# Altium PCB cw308_k82.PcbDoc
Units mil, origin at the board's own origin, x right, y up, seen from the top; angles counter-clockwise.
Board outline 2055 x 2540 mil, 2 copper layers (Top Layer, Bottom Layer); 17 components, 40 nets, 216 pads, 69 vias.
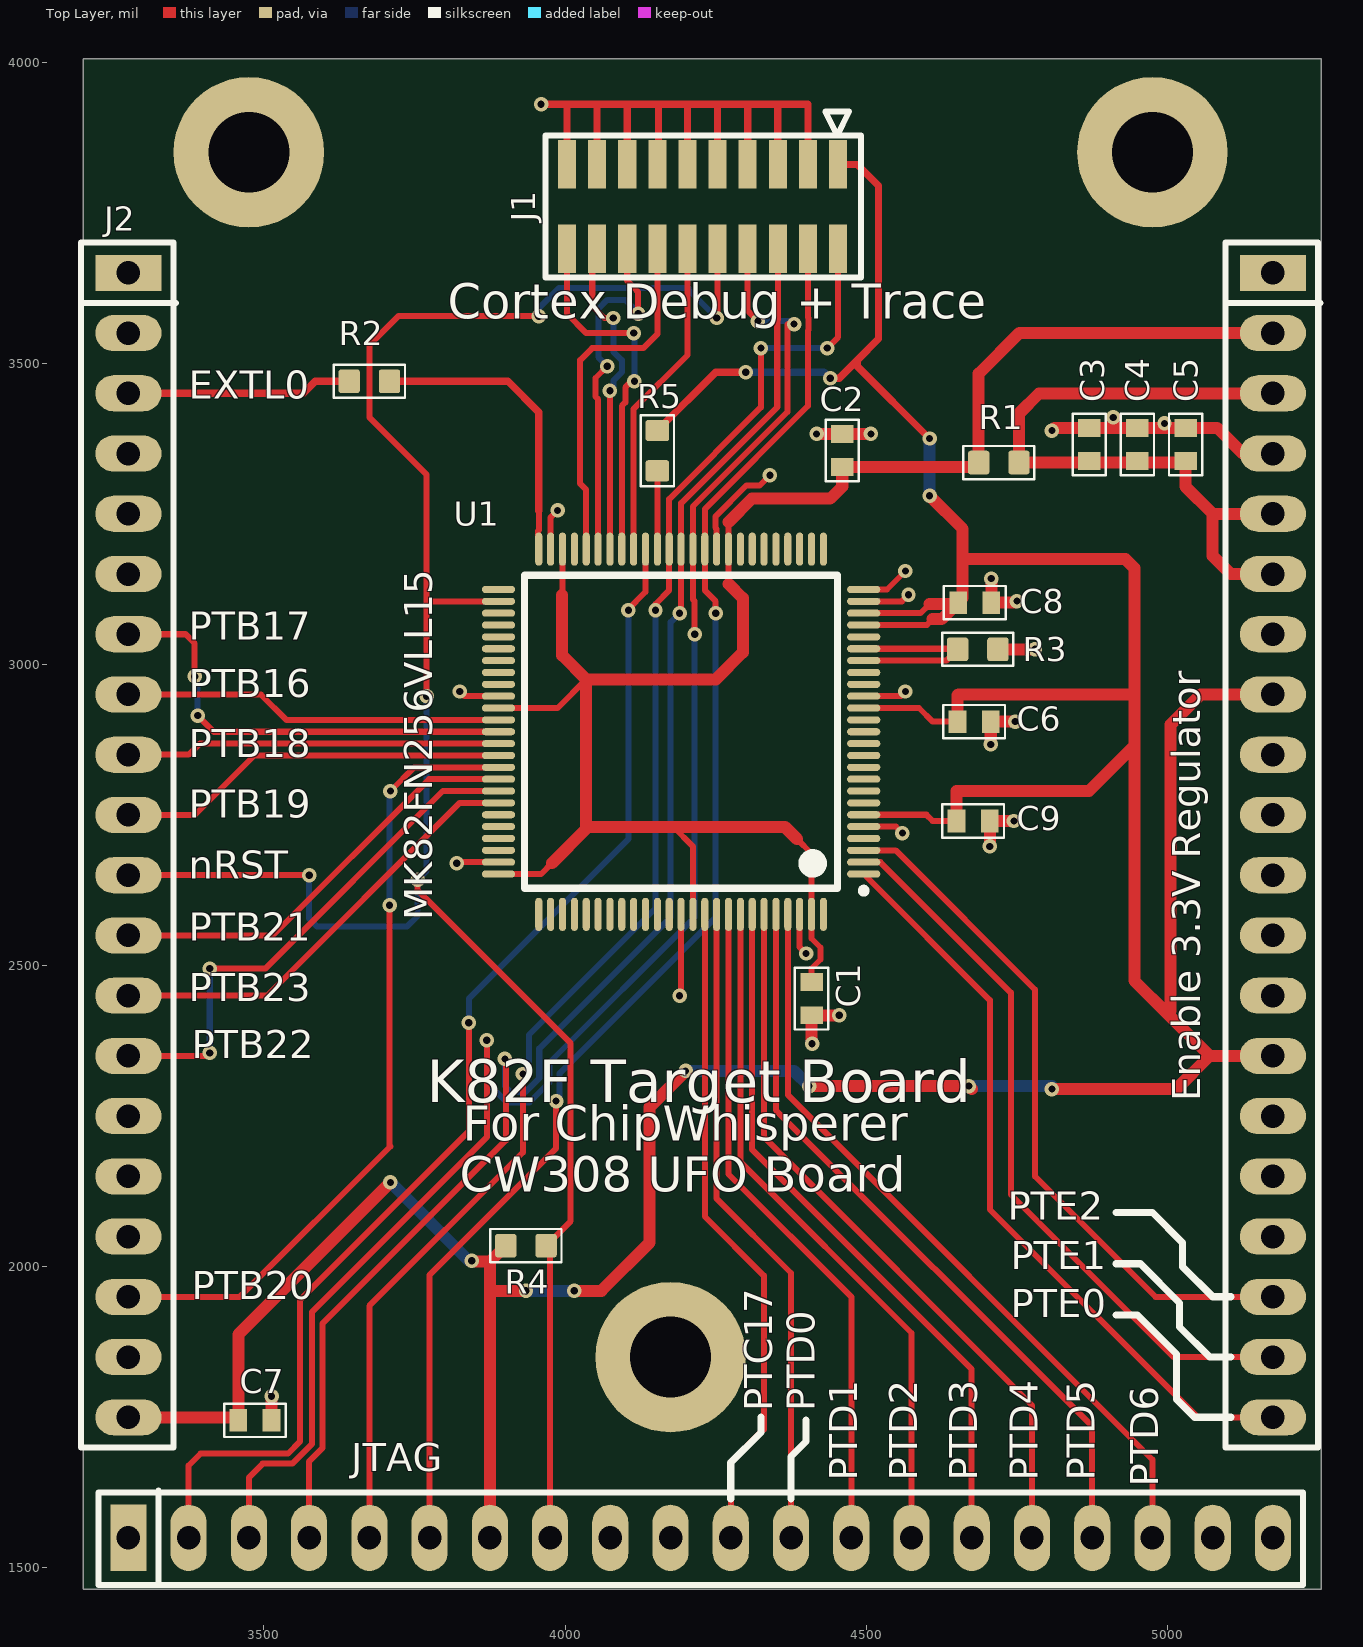
[diagram p0: Top Layer view]
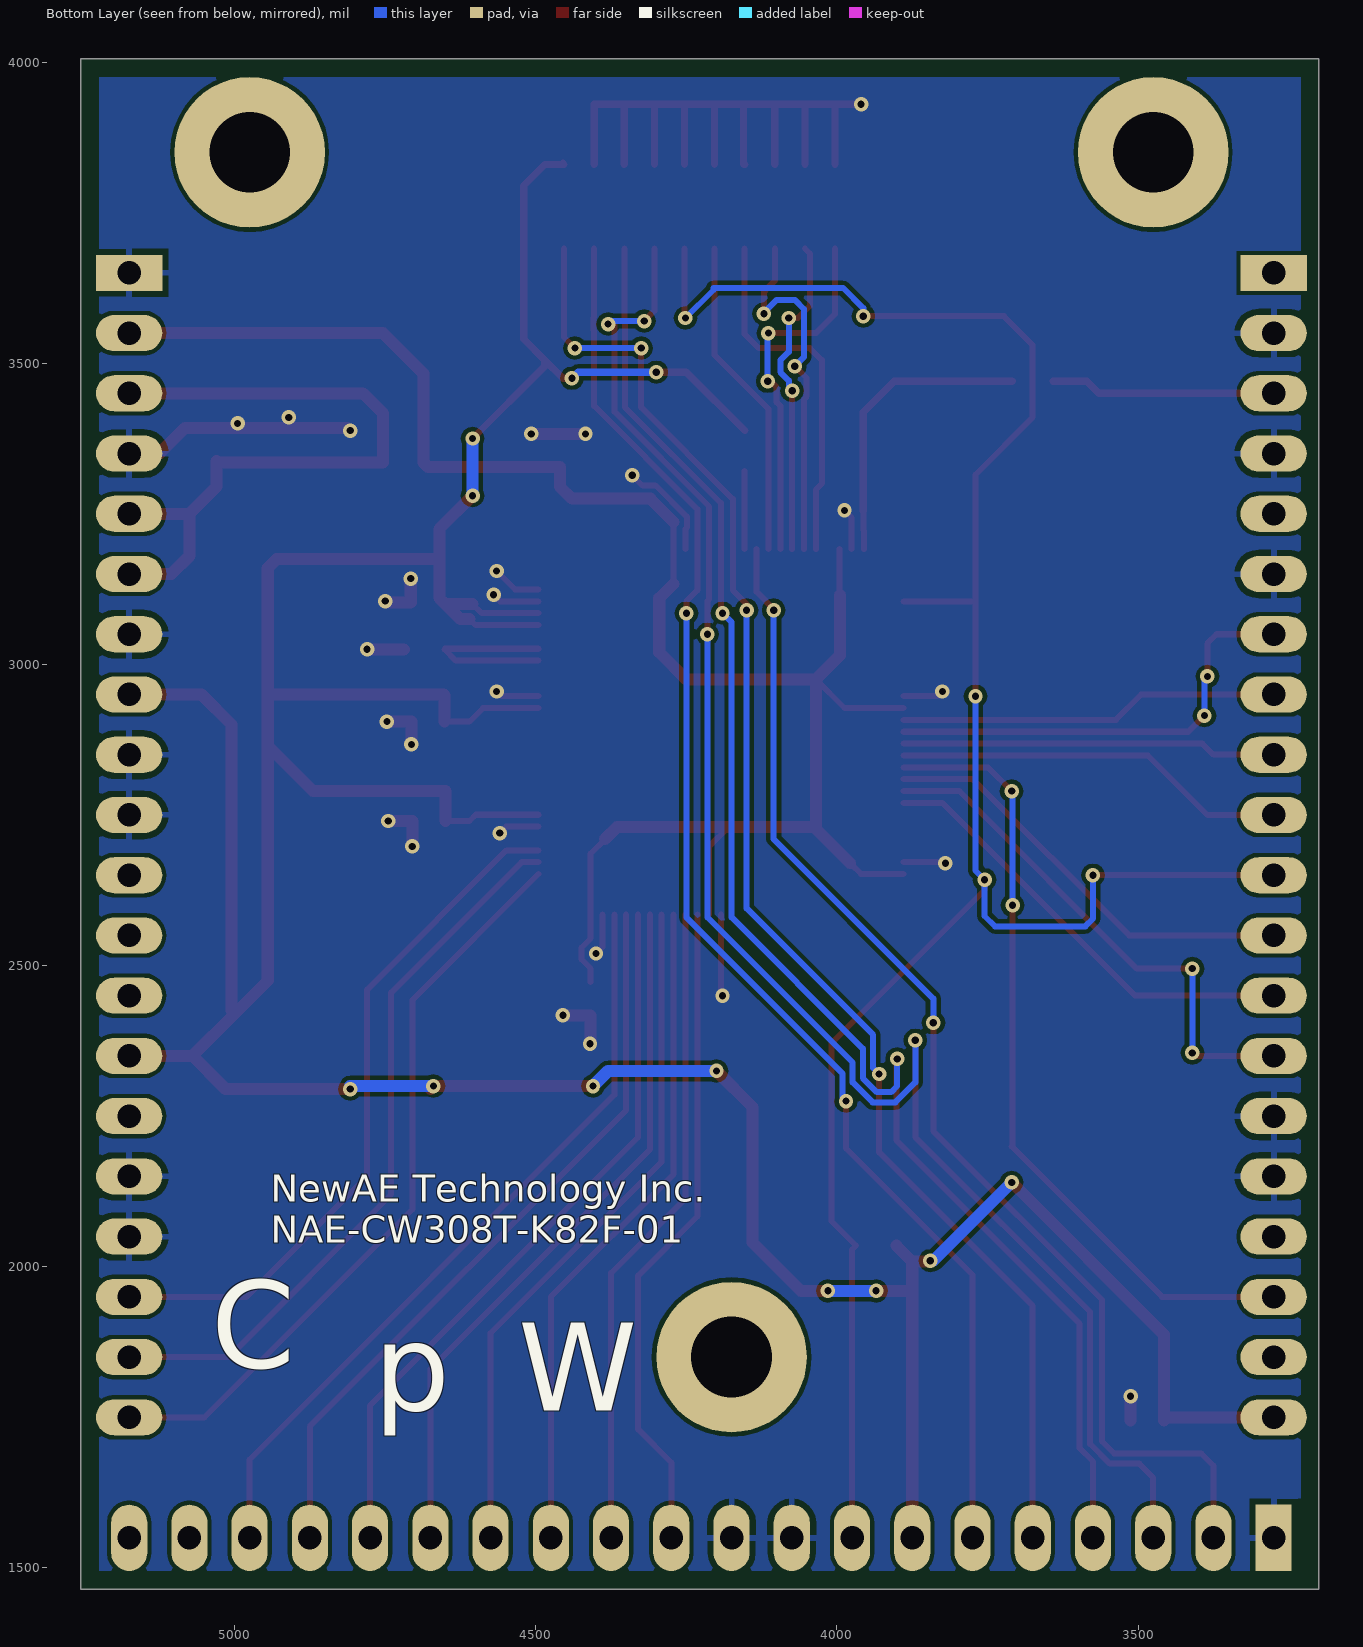
[diagram p1: Bottom Layer view, seen from below]

## Layer stack, top to bottom
Top Solder: solder mask 0.4, Solder Resist, Dk 3.5
Top Layer: signal copper 1.4
Dielectric 1: dielectric 12.6, FR-4, Dk 4.8
Bottom Layer: signal copper 1.4
Bottom Solder: solder mask 0.4, Solder Resist, Dk 3.5

## Board outline
3200,1465 5255,1465 5255,4005 3200,4005

## Design rules (kind name [scope] priority, off if disabled: settings)
BoardOutlineClearance Silk_to_Outline [(OnLayer('Top Overlay'))] p1: gap=0 ignorepadtopadclearanceinfootprint=FALSE
BoardOutlineClearance [All] p2: gap=30 ignorepadtopadclearanceinfootprint=FALSE
Clearance [All] p1: gap=7 ignorepadtopadclearanceinfootprint=FALSE
HoleSize [All] p1: absolutevalues=TRUE maxlimit=200 minlimit=1 maxpercent=80.000 minpercent=20.000
MinimumSolderMaskSliver [All] p1: minsoldermaskwidth=5
PlaneConnect PlaneConnect_viaDirect [IsVia] p1: planeconnectstyle=Direct reliefexpansion=20 reliefentries=4 reliefconductorwidth=10 reliefairgap=10
PlaneConnect [All] p2: planeconnectstyle=Relief reliefexpansion=20 reliefentries=4 reliefconductorwidth=10 reliefairgap=10
PolygonConnect PolygonConnect_viaDirect [All vs isVia] p1: connectstyle=Direct reliefconductorwidth=10 reliefentries=4 polygonreliefangle="90 Angle" airgapwidth=10
PolygonConnect [All] p2: connectstyle=Relief reliefconductorwidth=10 reliefentries=4 polygonreliefangle="90 Angle" airgapwidth=10
RoutingVias [All] p1: holewidth=12 width=24 viastyle="Through Hole" minholewidth=12 minwidth=24 maxholewidth=100 maxwidth=200
SilkToSilkClearance [All] p1: silktosilkclearance=5
SilkToSolderMaskClearance [IsPad] p1: minsilkscreentomaskgap=5 clearancetoexposedcopper=TRUE
SolderMaskExpansion [All] p1: expansion=4
Width [All] p1: maxlimit=100 minlimit=6 preferedwidth=8 minimp=50.000000 maximp=50.000000 favimp=50.000000
25 further rules are at their usual default settings.

## Classes and differential pairs
component class CW308_K82_UFO: J2

## Components (designator, comment, footprint, x,y, rotation, side; value= is the part's Value field where it differs from the comment)
C1 "DNM" CAPC0603_M 4409.02,2445 r270 top value=100n
C2 "DNM" CAPC0603_M 4460,3355 r90 top value=100n
C3 "100n" CAPC0603_M 4870,3365 r90 top
C4 "100n" CAPC0603_M 4950,3365 r90 top
C5 "2u2" CAPC0603_M 5030,3365 r90 top
C6 "100n" CAPC0603_M 4678.98,2905 r0 top
C7 "100n" CAPC0603_M 3485,1745 r0 top
C8 "100n" CAPC0603_M 4680,3102.48 r0 top
C9 "100n" CAPC0603_M 4677.44,2740 r0 top
J1 "1296-T20" 1296-T20 4353.11,3760.12 r180 top
J2 "CW308_TARGETCON" CW308_TBOARD_CONN 3275,3650 r0 top locked
R1 "10R" RESC1608X55N 4720,3335 r0 top
R2 "10R" RESC1608X55N 3675,3470 r0 top
R3 "10k" RESC1608X55N 4685,3025 r0 top
R4 "10k" RESC1608X55N 3935,2035 r180 top
R5 "10k" RESC1608X55N 4153.11,3354.69 r270 top
U1 "MK82FN256VLL15" SQFP50P1600X1600X170-100N 4192.48,2888.15 r180 top

## Footprints (in the part's own frame and the unit in brackets; to place one, negate y for a bottom-side part, rotate by r counter-clockwise, add the part's x,y. Pads: shape width x height; smd on the part's side, far side on the other; paste and mask are expansions set on the pad)
1296-T20 [mm] "1.27mm x 20-pin"
  rect 0.76x2.05 smd: 1(-2.54,-1.775) 2(-2.54,1.775) 3(-1.27,-1.775) 4(-1.27,1.775) 5(0,-1.775) 6(0,1.775) 7(1.27,-1.775) 8(1.27,1.775) 9(2.54,-1.775) 10(2.54,1.775) 11(3.81,-1.775) 12(3.81,1.775) 13(5.08,-1.775) 14(5.08,1.775) 15(6.35,-1.775) 16(6.35,1.775) 17(7.62,-1.775) 18(7.62,1.775) 19(8.89,-1.775) 20(8.89,1.775)
  silkscreen extent -3.5,-4 9.8,3
CAPC0603_M [mm]
  rect 0.75x0.95 smd: 1(-0.7,0) 2(0.7,0)
  silkscreen extent -1.3,-0.7 1.3,0.7, body extent -0.85,-0.45 0.85,0.45, height 0.9
CW308_TBOARD_CONN [mil]
  rect 110x60 hole 39: A1(0,0) C1(1900,0)
  oval 110x60 hole 39: A2(0,-100) A3(0,-200) A4(0,-300) A5(0,-400) A6(0,-500) A7(0,-600) A8(0,-700) A9(0,-800) A10(0,-900) A11(0,-1000) A12(0,-1100) A13(0,-1200) A14(0,-1300) A15(0,-1400) A16(0,-1500) A17(0,-1600) A18(0,-1700) A19(0,-1800) A20(0,-1900) C2(1900,-100) C3(1900,-200) C4(1900,-300) C5(1900,-400) C6(1900,-500) C7(1900,-600) C8(1900,-700) C9(1900,-800) C10(1900,-900) C11(1900,-1000) C12(1900,-1100) C13(1900,-1200) C14(1900,-1300) C15(1900,-1400) C16(1900,-1500) C17(1900,-1600) C18(1900,-1700) C19(1900,-1800) C20(1900,-1900)
  rect 60x110 hole 39: B1(0,-2100)
  oval 60x110 hole 39: B2(100,-2100) B3(200,-2100) B4(300,-2100) B5(400,-2100) B6(500,-2100) B7(600,-2100) B8(700,-2100) B9(800,-2100) B10(900,-2100) B11(1000,-2100) B12(1100,-2100) B13(1200,-2100) B14(1300,-2100) B15(1400,-2100) B16(1500,-2100) B17(1600,-2100) B18(1700,-2100) B19(1800,-2100) B20(1900,-2100)
  round 250 hole 134: MH1(200,200) MH2(900,-1800) MH2(1700,200)
  silkscreen extent -79,-2179 1979,50, body extent -50,-2149 1950,50, height 48
RESC1608X55N [mm] "Chip Resistor, Body 1.6x0.8mm, EIA 0603, IPC Medium Density"
  round 0.254 on Mech15: 0(0,0)
  rrect25% 0.9x1 smd: 1(-0.85,0) 2(0.85,0)
  Top Layer pour cut-out: -0.6,0.5 0.6,0.5 0.6,-0.5 -0.6,-0.5
  silkscreen extent -1.5,-0.7 1.5,0.7, body extent -0.87,-0.47 0.88,0.48, height 0.54
SQFP50P1600X1600X170-100N [mm] "SQFP, 100-Leads, Body 14.00x14.00mm, Pitch 0.50mm, IPC Medium Density"
  oval 1.4x0.3 smd paste-0.051: 1(-7.7,6) 2(-7.7,5.5) 3(-7.7,5) 4(-7.7,4.5) 5(-7.7,4) 6(-7.7,3.5) 7(-7.7,3) 8(-7.7,2.5) 9(-7.7,2) 10(-7.7,1.5) 11(-7.7,1) 12(-7.7,0.5) 13(-7.7,0) 14(-7.7,-0.5) 15(-7.7,-1) 16(-7.7,-1.5) 17(-7.7,-2) 18(-7.7,-2.5) 19(-7.7,-3) 20(-7.7,-3.5) 21(-7.7,-4) 22(-7.7,-4.5) 23(-7.7,-5) 24(-7.7,-5.5) 25(-7.7,-6) 51(7.7,-6) 52(7.7,-5.5) 53(7.7,-5) 54(7.7,-4.5) 55(7.7,-4) 56(7.7,-3.5) 57(7.7,-3) 58(7.7,-2.5) 59(7.7,-2) 60(7.7,-1.5) 61(7.7,-1) 62(7.7,-0.5) 63(7.7,0) 64(7.7,0.5) 65(7.7,1) 66(7.7,1.5) 67(7.7,2) 68(7.7,2.5) 69(7.7,3) 70(7.7,3.5) 71(7.7,4) 72(7.7,4.5) 73(7.7,5) 74(7.7,5.5) 75(7.7,6)
  oval 0.3x1.4 smd paste-0.051: 26(-6,-7.7) 27(-5.5,-7.7) 28(-5,-7.7) 29(-4.5,-7.7) 30(-4,-7.7) 31(-3.5,-7.7) 32(-3,-7.7) 33(-2.5,-7.7) 34(-2,-7.7) 35(-1.5,-7.7) 36(-1,-7.7) 37(-0.5,-7.7) 38(0,-7.7) 39(0.5,-7.7) 40(1,-7.7) 41(1.5,-7.7) 42(2,-7.7) 43(2.5,-7.7) 44(3,-7.7) 45(3.5,-7.7) 46(4,-7.7) 47(4.5,-7.7) 48(5,-7.7) 49(5.5,-7.7) 50(6,-7.7) 76(6,7.7) 77(5.5,7.7) 78(5,7.7) 79(4.5,7.7) 80(4,7.7) 81(3.5,7.7) 82(3,7.7) 83(2.5,7.7) 84(2,7.7) 85(1.5,7.7) 86(1,7.7) 87(0.5,7.7) 88(0,7.7) 89(-0.5,7.7) 90(-1,7.7) 91(-1.5,7.7) 92(-2,7.7) 93(-2.5,7.7) 94(-3,7.7) 95(-3.5,7.7) 96(-4,7.7) 97(-4.5,7.7) 98(-5,7.7) 99(-5.5,7.7) 100(-6,7.7)
  silkscreen extent -7.83,-6.6 6.6,6.82, body extent -8,-8 8,8, height 1.7

## Part data
C1 C2: library part CCHIP-100n-0603, Case-EIA=0603, Case-Metric=1608, Manufacture 1=Kemet, Manufacture Part Number 1=C0603C104K5RACTU, Rated Voltage=50VDC, Supplier Part Number 1=399-5089-2-ND, Component Group=Capacitor, Component Type=Standard, Mounting Technology=SMT, Part Number=CCHIP-100n-0603, Pin Count=2, Supplier 1=Digi-Key
C3 C4 C6 C7 C8 C9: library part CCHIP-100n-0603, "100n, 0603", Case-EIA=0603, Case-Metric=1608, Manufacture 1=Kemet, Manufacture Part Number 1=C0603C104K5RACTU, Rated Voltage=50VDC, Supplier Part Number 1=399-5089-2-ND, Component Group=Capacitor, Component Type=Standard, Mounting Technology=SMT, Part Number=CCHIP-100n-0603, Pin Count=2, Supplier 1=Digi-Key
C5: library part CCHIP-2u2-0603, "2u2, 0603", Case-EIA=0603, Case-Metric=1608, Manufacture 1=Samsung, Manufacture Part Number 1=CL10B225KP8NNNC, Rated Voltage=10VDC, Supplier Part Number 1=1276-1134-2-ND, Component Group=Capacitor, Component Type=Standard, Mounting Technology=SMT, Part Number=CCHIP-2u2-0603, Pin Count=2, Supplier 1=Digi-Key
J1: "Header, 20-pin, SMD, 0.05\"", Component Group=Connector, Component Type=Standard, Mounting Technology=SMT, Part Number=1296-T20, Pin Count=20
J2: library part CW308_TBOARD, "CW308 \"Standard\" Target Board Connector", Component Group=Mechanical, Component Type=Standard, Mounting Technology=Through-hole, Part Number=CW308_TBOARD, Pin Count=60, Pitch=2.54mm
R1 R2: library part RCHIP-10R-0603, "10R res, 0603, 1%, 1/10W", Case-EIA=0603, Case-Metric=1608, Manufacture 1=Yageo, Manufacture Part Number 1=RC0603FR-0710RL, Rated Power=0.1W, Rated Voltage=75VDC, Supplier Part Number 1=311-10.0HRCT-ND, Temperature Range="-55C to 155C", Tolerance=1%, Component Group=Resistor, Component Type=Standard, Mounting Technology=SMT, Part Number=RCHIP-10R-0603, Pin Count=2, Supplier 1=Digi-Key
R3 R4 R5: library part RCHIP-10K-0603, "10k res, 0603, 1%, 1/10W", Case-EIA=0603, Case-Metric=1608, Manufacture 1=Yageo, Manufacture Part Number 1=RC0603FR-0710KL, Rated Power=0.1W, Rated Voltage=75VDC, Supplier Part Number 1=311-10.0KHRCT-ND, Temperature Range="-55C to 155C", Tolerance=1%, Component Group=Resistor, Component Type=Standard, Mounting Technology=SMT, Part Number=RCHIP-10K-0603, Pin Count=2, Supplier 1=Digi-Key
U1: "ARM® Cortex®-M4 Kinetis K8x Microcontroller IC 32-Bit 150MHz 256KB (256K x 8) FLASH 100-LQFP (14x14)", Manufacture 1=NXP, Supplier Part Number 1=MK82FN256VLL15-ND, Component Group="Digital IC", Component Type=Standard, Manufacture Part Number 1=MK82FN256VLL15, Mounting Technology=SMT, Part Number=MK82FN256VLL15, Pin Count=100, PP Material Stack=0, PP Rotation=0, RoHS=Yes, Supplier 1=Digi-Key

## Via types
v1: diameter 24, hole 12, Top Layer to Bottom Layer, tented both sides, 69 vias

## Nets (pads, with @x,y where several pads share a name; then routed paths per layer and width w, separated by ;. In a path a pad name is that pad's centre, name@x,y a point inside that pad or via, vN(x,y) a via of type N, cw(c..) or ccw(c..) an arc to the next point about the centre after c; other vN are vias at no path point)
CLKIN: J2.A3 R2.1 | length 374.8
  Top Layer w12: J2.A3 3565.32,3450 3585.32,3470 R2.1
CS: J2.A18 U1.66 | length 1325.2
  Top Layer w10: J2.A18 3460,1950 3710,2200 3708.46,2201.54 v1(3708.46,2600) ; v1(3710,2789.72) 3749.37,2829.09 U1.66
  Bottom Layer w10: v1(3708.46,2600) 3708.46,2788.19 v1(3710,2789.72)
GND: C1.2 C2.2 C3.2 C4.2 C5.2 C6.2 C7.2 C8.2 C9.2 J1.3 J1.5 J1.7 J1.9 J1.11 J1.13 J1.15 J1.17 J1.19 J2.A2 J2.A4 J2.A6 J2.A15 J2.A16 J2.B1 J2.B9 J2.B10 J2.C1 J2.C4 J2.C7 J2.C9 J2.C10 J2.C16 J2.C17 R3.2 U1.5 U1.16 U1.24 U1.25 U1.35 U1.49 U1.60 U1.74 U1.88 U1.98 | length 3175.8
  Top Layer w10: v1(3820,2670) 3821.61,2671.61 U1.74 ; v1(3825,2955) 3832.8,2947.2 U1.60 ; U1.49 3975.94,3244.03 v1(3987.52,3255.6) ; v1(4190,2450) 4192.48,2452.48 4192.48,2527.52 U1.88 ; U1.35 4251.54,3224.79 4249.22,3227.11 4249.22,3245.33 4300.89,3297 4323,3297 v1(4340,3314) ; U1.98 4389.33,2530.67 v1(4400,2520) ; U1.5 4549.33,2730.67 v1(4560,2720) ; U1.16 4557.2,2947.2 v1(4565,2955) ; U1.24 4559.06,3104.68 v1(4570,3115.63) ; U1.25 4534.37,3124.37 v1(4565,3155)
  Top Layer w12: v1(3960,3930) 4000,3930 ; J1.19 4003.11,3926.89 4000,3930 ; J1.17 4053.11,3930 ; J1.15 4103.11,3930 ; J1.13 4155,3830 4155,3930 ; J1.11 4203.11,3930 ; J1.9 4253.11,3930 ; J1.7 4303.11,3930 ; J1.5 4353.11,3930 ; J1.3 4403.11,3930 4353.11,3930 ; 4000,3930 4053.11,3930 ; 4053.11,3930 4103.11,3930 ; 4103.11,3930 4155,3930 ; 4155,3930 4203.11,3930 ; 4203.11,3930 4253.11,3930 ; 4253.11,3930 4303.11,3930 ; 4303.11,3930 4353.11,3930
  Top Layer w20: C7.2 v1(3512.56,1785) ; v1(4410,2370) 4410,2375 4409.02,2375.98 C1.2 v1(4455,2417.44) ; v1(4417.44,3382.56) C2.2 v1(4507.56,3382.56) ; v1(4705,2697.8) C9.2 v1(4745,2740) ; v1(4706.54,2867.09) C6.2 v1(4747.17,2905) ; v1(4707.56,3142.44) C8.2 4747.48,3102.48 v1(4750,3105) ; R3.2 v1(4780,3025) ; v1(4808.15,3388.15) 4812.56,3392.56 C3.2 4910,3392.56 ; v1(4910,3410) 4910,3392.56 ; v1(4995,3400) v1@4995,3392.56 ; J2.C4 5125,3350 5082.44,3392.56 C5.2 v1@4995,3392.56 ; 4910,3392.56 C4.2 v1@4995,3392.56
GPIO1_TX: J2.A7 U1.63 | length 748.7
  Top Layer w10: J2.A7 3370,3050 3385,3035 v1(3385,2980) ; v1(3390,2915) 3416.85,2888.15 U1.63
  Bottom Layer w10: v1(3385,2980) 3390,2975 v1(3390,2915)
GPIO2_RX: J2.A8 U1.62 | length 631.8
  Top Layer w10: J2.A8 3495,2950 3537.17,2907.83 U1.62
GPIO3: J2.A9 U1.64 | length 622
  Top Layer w10: J2.A9 3375,2850 3393.46,2868.46 U1.64
GPIO4: J2.A10 U1.65 | length 655.2
  Top Layer w10: J2.A10 3385,2750 3483.78,2848.78 U1.65
HDR1: J2.B11 U1.90 | length 1098.4
  Top Layer w10: U1.90 4231.85,2083.43 4330,1985.28 4330,1730 4275,1675 J2.B11
HDR2: J2.B12 U1.91 | length 1086.1
  Top Layer w10: U1.91 4251.54,2113.11 4375,1989.65 J2.B12
HDR3: J2.B13 U1.92 | length 1119.4
  Top Layer w10: U1.92 4271.22,2153.78 4475,1950 J2.B13
HDR4: J2.B14 U1.93 | length 1152.7
  Top Layer w10: U1.93 4290.91,2174.09 4575,1890 J2.B14
HDR5: J2.B15 U1.94 | length 1185.9
  Top Layer w10: U1.94 4310.59,2194.41 4675,1830 J2.B15
HDR6: J2.B16 U1.95 | length 1219.2
  Top Layer w10: U1.95 4330.28,2214.72 4775,1770 J2.B16
HDR7: J2.B17 U1.96 | length 1252.5
  Top Layer w10: U1.96 4349.96,2260.04 4875,1735 J2.B17
HDR8: J2.B18 U1.97 | length 1285.7
  Top Layer w10: U1.97 4369.65,2285.35 4975,1680 J2.B18
HDR9: J2.B19
HDR10: J2.B20
JTAG_TCK: J1.4 J2.B6 U1.36 | length 2416.2
  Top Layer w10: J2.B6 3775,1986.38 3985,2196.38 v1(3985,2275) ; v1(4250,3085) 4250,3104.68 4231.85,3122.83 U1.36 4231.85,3257.81 4403.11,3429.07 4403.11,3554.17 4404,3555.06 4404,3574.94 4403.11,3575.83 J1.4
  Bottom Layer w10: v1(3985,2275) 3991,2281 3991,2321 4250,2580 v1(4250,3085)
JTAG_TDI: J1.8 J2.B3 U1.37 | length 2844.5
  Top Layer w10: J2.B3 3475,1650 3498,1673 3547.04,1673 3580,1705.96 3580,1925 3870,2215 v1(3870,2375.98) ; v1(4215,3050) 4215,3105 4212.17,3107.83 U1.37 4212.17,3262.17 4369.11,3419.11 4369.11,3564.11 4370,3565 v1(4380,3565) ; J1.8 4303.11,3586.89 v1(4320,3570)
  Bottom Layer w10: v1(3870,2375.98) 3870,2305.96 3903.12,2272.84 3940.82,2272.84 3974,2306.02 3974,2339 4215,2580 v1(4215,3050) ; v1(4320,3570) 4375,3570 v1(4380,3565)
JTAG_TDO: J1.6 J2.B4 U1.38 | length 2588
  Top Layer w10: J2.B4 3575,1676.92 3597,1698.92 3597,1905.46 3901.54,2210 3901.54,2343.46 v1(3900,2345) ; v1(4190,3085) 4192.48,3087.48 U1.38 4192.48,3267.48 4352.11,3427.11 4352.11,3571.15 4353.11,3572.15 J1.6
  Bottom Layer w10: v1(3900,2345) 3900,2300 3910.16,2289.84 3933.78,2289.84 3957,2313.06 3957,2362 4175,2580 4175,3070 v1(4190,3085)
JTAG_TMS: J1.2 J2.B5 U1.39 | length 2527
  Top Layer w10: J2.B5 3675,1935 3930,2190 v1(3930,2320) ; v1(4150,3090) 4150,3100 4172.8,3122.8 U1.39 4172.8,3274.37 4325,3426.57 v1(4325,3525) ; v1(4435,3525) 4453.11,3543.11 J1.2
  Bottom Layer w10: v1(3930,2320) 3940,2330 3940,2385 4150,2595 v1(4150,3090) ; v1(4325,3525) v1(4435,3525)
JTAG_TRST: J2.B2 U1.41 | length 2043.1
  Top Layer w10: J2.B2 3375,1670 3395,1690 3540,1690 3560,1710 3560,1945 3840,2225 v1(3840,2405) ; v1(4105,3090) 4103.11,3090 4133.43,3120.32 U1.41
  Bottom Layer w10: v1(3840,2405) 3840,2445 4105,2710 v1(4105,3090)
LED1: J2.C18 U1.3 | length 1168
  Top Layer w10: U1.3 4548.7,2691.3 4780,2460 4780,2150 4980,1950 J2.C18
LED2: J2.C19 U1.2 | length 1215.9
  Top Layer w10: U1.2 4523.39,2671.61 4740,2455 4740,2120 5010,1850 J2.C19
LED3: J2.C20 U1.1 | length 1256.6
  Top Layer w10: U1.1 4705,2442.56 4705,2095 5050,1750 J2.C20
MISO: J2.A13 U1.69 | length 746.9
  Top Layer w10: J2.A13 3505,2450 3825.04,2770.04 U1.69
MOSI: J2.A14 U1.68 | length 878.5
  Top Layer w10: J2.A14 3405,2350 v1(3410,2355) ; v1(3410,2495) 3502.17,2495 3796.89,2789.72 U1.68
  Bottom Layer w10: v1(3410,2355) v1(3410,2495)
NetR2_2: R2.2 U1.50 | length 497
  Top Layer w10: U1.50@3955.04,3191.3 3955.04,3221.61 3956.26,3222.83 3956.26,3255
  Top Layer w12: R2.2 3905,3470 3956.26,3418.74 3956.26,3255
NetR3_1: R3.1 U1.19 U1.20 | length 320
  Top Layer w10: U1.19 4632.8,3006.26 R3.1 4650.59,3025.94 U1.20
NetR5_2: R5.2 U1.40 | length 129.9
  Top Layer w10: U1.40 R5.2
nRST: J1.10 J2.A11 J2.B8 R4.1 U1.52 | length 3661.7
  Top Layer w10: J2.A11 v1(3575,2650) ; v1(3755,2642.52) 3755,2625 4009,2371 4009,2075.54 R4.1 3975,2028.46 J2.B8 ; v1(3770,2947.2) 3770,3102.48 ; U1.52 3772.2,3104.68 3770,3102.48 ; v1@3958.11,3578.11 v1(3956.26,3578.11) 3723.11,3578.11 3675,3530 3675,3410 3770,3315 3770,3102.48 ; v1(4251.54,3575) 4250,3575 4253.11,3578.11 J1.10
  Bottom Layer w10: v1(3575,2650) 3575,2577.75 3587.75,2565 3737.68,2565 3755,2582.32 v1(3755,2642.52) 3770,2657.52 v1(3770,2947.2) ; v1(3956.26,3578.11) 3956.26,3591.26 3990,3625 4205,3625 4205,3621.54 v1(4251.54,3575)
SCK: J2.A12 U1.67 | length 721.8
  Top Layer w10: J2.A12 3515,2550 3774.41,2809.41 U1.67
SHUNTH: C3.1 C4.1 C5.1 J2.C3 J2.C5 J2.C6 R1.2 | length 1183
  Top Layer w20: J2.C6 5105,3150 5075,3180 5075,3250 ; J2.C5 5075,3250 ; J2.C3 4786.89,3450 4753.46,3416.57 R1.2 5027.56,3335 C5.1 5030,3295 5075,3250
SHUNTL: C1.1 C2.1 J2.C2 R1.1 U1.34 U1.48 U1.61 U1.75 U1.89 U1.99 | length 3244.9
  Top Layer w10: U1.75 3960,2651.93 3978.07,2670 ; U1.61 3987.52,2927.52 4035,2975 ; 3995,3115 3995.63,3115.63 U1.48 ; 4179.96,2730 4212.17,2697.8 U1.89 ; 4271.22,3133.78 U1.34 4271.22,3236.22 ; 4385,2710 4409.02,2685.98 U1.99 4409.02,2544.93 4424,2529.94 4424,2510.06 4409.02,2495.07 C1.1
  Top Layer w20: 3978.07,2670 4035,2726.93 ; 3995,3115 3995,3015 4035,2975 ; 4271.22,3133.78 4295,3110 4295,3020 4250,2975 4035,2975 ; 4271.22,3236.22 4310,3275 4440,3275 4460,3295 C2.1 4678.98,3327.44 R1.1 4686.54,3482.56 4753.98,3550 J2.C2 ; 4385,2710 4365,2730 4179.96,2730 4038.07,2730 4035,2726.93 ; 4035,2726.93 4035,2975
TRACECLK: J1.12 U1.42 | length 536
  Top Layer w10: U1.42 4113.74,3424.05 4203.11,3513.43 J1.12
TRACED0: J1.14 U1.46 | length 605.9
  Top Layer w10: U1.46 4035,3290 4025,3300 4025,3505 4045,3525 4130,3525 4153.11,3548.11 J1.14
TRACED1: J1.16 U1.45 | length 614.1
  Top Layer w10: U1.45 4054.68,3440.11 4050.37,3444.43 4050.37,3475.37 v1(4070,3495) ; J1.16 4103.11,3636.89 4114.06,3625.94 4113.74,3625.63 4121.27,3618.1 v1(4121.27,3581.89)
  Bottom Layer w10: v1(4070,3495) 4055,3510 4055,3590 4070,3605 4100,3605 4121.27,3583.73 v1(4121.27,3581.89)
TRACED2: J1.18 U1.44 | length 539.5
  Top Layer w10: J1.18 4045,3682.13 4045,3595 4065,3575 v1(4080,3575) ; U1.44 v1(4074.37,3454.37)
  Bottom Layer w10: v1(4074.37,3454.37) 4080,3460 4080,3471.06 4094,3485.06 4094,3504.94 4080,3518.94 v1(4080,3575)
TRACED3: J1.20 U1.43 | length 603
  Top Layer w10: J1.20 4003.11,3581.89 4035,3550 v1(4113.74,3550) ; U1.43 4094.06,3429.06 4100,3435 4100,3460 4110,3470 v1(4115,3470)
  Bottom Layer w10: v1(4113.74,3550) 4115,3548.74 v1(4115,3470)
VCC: C6.1 C7.1 C8.1 C9.1 J1.1 J2.A20 J2.B7 J2.C8 J2.C14 R4.2 R5.1 U1.6 U1.15 U1.22 U1.23 | length 7479.2
  Top Layer w10: U1.6 4599.65,2750.35 4610,2740 C9.1 ; U1.15 4587.48,2927.52 4610,2905 C6.1 ; U1.22 4600.31,3065.32 4610,3075 ; U1.23 4590,3085 4605,3100
  Top Layer w12: R5.1 4250.02,3485.06 v1(4300,3485.06) ; v1(4440,3475) 4455,3475 4485,3505 ; J1.1@4455,3831.89 J1.1 4485,3830 4520,3795 4520,3540 4485,3505 ; v1(4605,3375) 4485,3495 4485,3505
  Top Layer w20: J2.A20 3452.44,1750 C7.1 3457.44,1887.44 v1(3710,2140) ; v1(3845,2010) 3846.54,2008.46 3875,2008.46 ; J2.B7 3875,1960 ; R4.2 3875,2008.46 ; v1(3935,1960) 3875,1960 ; v1(4015,1960) 4060,1960 4140,2040 4140,2265 v1(4200,2325) ; v1(4405,2300) v1(4670,2300) v1@4675,2295 ; 4605,3100 C8.1@4649.96,3100 ; v1(4605,3280) 4660,3225 4660,3175 ; 4610,3075 4624.96,3075 C8.1@4649.96,3100 ; C9.1 4649.88,2789.72 4650.16,2790 4870,2790 4945,2865 ; C6.1 4651.42,2948.74 4652.68,2950 4945,2950 ; v1(4808.15,2295) 5015,2295 5070,2350 ; J2.C14 5070,2350 ; J2.C8 5055,2950 5005,2900 5005,2425 5000,2420 ; 3875,1960 3875,2008.46 ; C8.1@4649.96,3100 C8.1 4660,3110.04 4660,3175 ; 4660,3175 4930,3175 4945,3160 4945,2950 ; 4945,2865 4945,2475 5000,2420 ; 4945,2865 4945,2950 ; 5000,2420 5070,2350
  Bottom Layer w12: v1(4300,3485.06) 4429.94,3485.06 v1(4440,3475)
  Bottom Layer w20: v1(3710,2140) 3840,2010 v1(3845,2010) ; v1(3935,1960) v1(4015,1960) ; v1(4200,2325) 4380,2325 v1(4405,2300) ; v1(4605,3280) v1(4605,3375) ; v1(4670,2300) 4808.15,2300 v1(4808.15,2295)
pads on no net: J2.A1 J2.A5 J2.A17 J2.A19 J2.C11 J2.C12 J2.C13 J2.C15 J2.MH1 J2.MH2 R1.0 R2.0 R3.0 R4.0 R5.0 U1.4 U1.7 U1.8 U1.9 U1.10 U1.11 U1.12 U1.13 U1.14 U1.17 U1.18 U1.21 U1.26 U1.27 U1.28 U1.29 U1.30 U1.31 U1.32 U1.33 U1.47 U1.51 U1.53 U1.54 U1.55 U1.56 U1.57 U1.58 U1.59 U1.70 U1.71 U1.72 U1.73 U1.76 U1.77 U1.78 U1.79 U1.80 U1.81 U1.82 U1.83 U1.84 U1.85 U1.86 U1.87 U1.100

## Polygon pours and split planes (outlines as drawn)
GND on Bottom Layer "GND_L02_P000" (solid, pour order 0): 3125,4070 3160,4105 5330,4105 5330,1530 5160,1360 3055,1360

## Silkscreen, mask and mechanical layers (free items; w line width, h text height)
Top Overlay:
  lines w12: 4275,1615 4275,1675 4325,1725 4325,1750 ; 4375,1615 4375,1685 4400,1710 4400,1745 ; 4915,1920 4950,1920 5015,1855 5015,1780 5045,1750 5105,1750 ; 4915,2005 4955,2005 5020,1940 5020,1900 5070,1850 5105,1850 ; 4915,2090 4975,2090 5025,2040 5025,2000 5075,1950 5105,1950
  text "Cortex Debug + Trace" at 3805,3555 h100
  text "EXTL0" at 3375,3425 h80
  text "PTB17" at 3375,3025 h80
  text "PTB16" at 3375,2930 h80
  text "PTB18" at 3375,2830 h80
  text "PTB19" at 3375,2730 h80
  text "nRST" at 3375,2628.31 h80
  text "MK82FN256VLL15" at 3795,2575 h80 r90
  text "PTB21" at 3375,2525 h80
  text "PTB23" at 3375,2425 h80
  text "PTB22" at 3380,2330 h80
  text "Enable 3.3V Regulator" at 5070,2275 h80 r90
  text "K82F Target Board" at 3770,2250 h120
  text "For ChipWhisperer" at 3830,2190 h100
  text "CW308 UFO Board" at 3825,2105 h100
  text "PTE2" at 4735,2062.56 h80
  text "PTE1" at 4740,1980 h80
  text "PTB20" at 3380,1930 h80
  text "PTE0" at 4740,1900 h80
  text "PTC17" at 4360,1760 h80 r90
  text "PTD0" at 4430,1760 h80 r90
  text "JTAG" at 3645,1645 h80
  text "PTD1" at 4500.55,1645 h80 r90
  text "PTD2" at 4600,1645 h80 r90
  text "PTD3" at 4700,1645 h80 r90
  text "PTD4" at 4800,1645 h80 r90
  text "PTD5" at 4895,1645 h80 r90
  text "PTD6" at 5000,1635 h80 r90
Bottom Overlay:
  text "NewAE Technology Inc. / NAE-CW308T-K82F-01" at 4940,2040 h45
  text "C" at 5039,1783 h250
  text "W" at 4529,1713 h250
  text "p" at 4769,1713 h250
Mechanical 1:
  the board outline again, w10